# Altium PCB PCB2_0.PcbDoc
Units mm, origin at the board's own origin, x right, y up, seen from the top; angles counter-clockwise.
Board outline 100 x 70 mm, 2 copper layers (Top Layer, Bottom Layer), stack 1.671 mm thick; 68 components, 68 nets, 266 pads, 103 vias.
Unrouted connection lines stored in the file: 58.
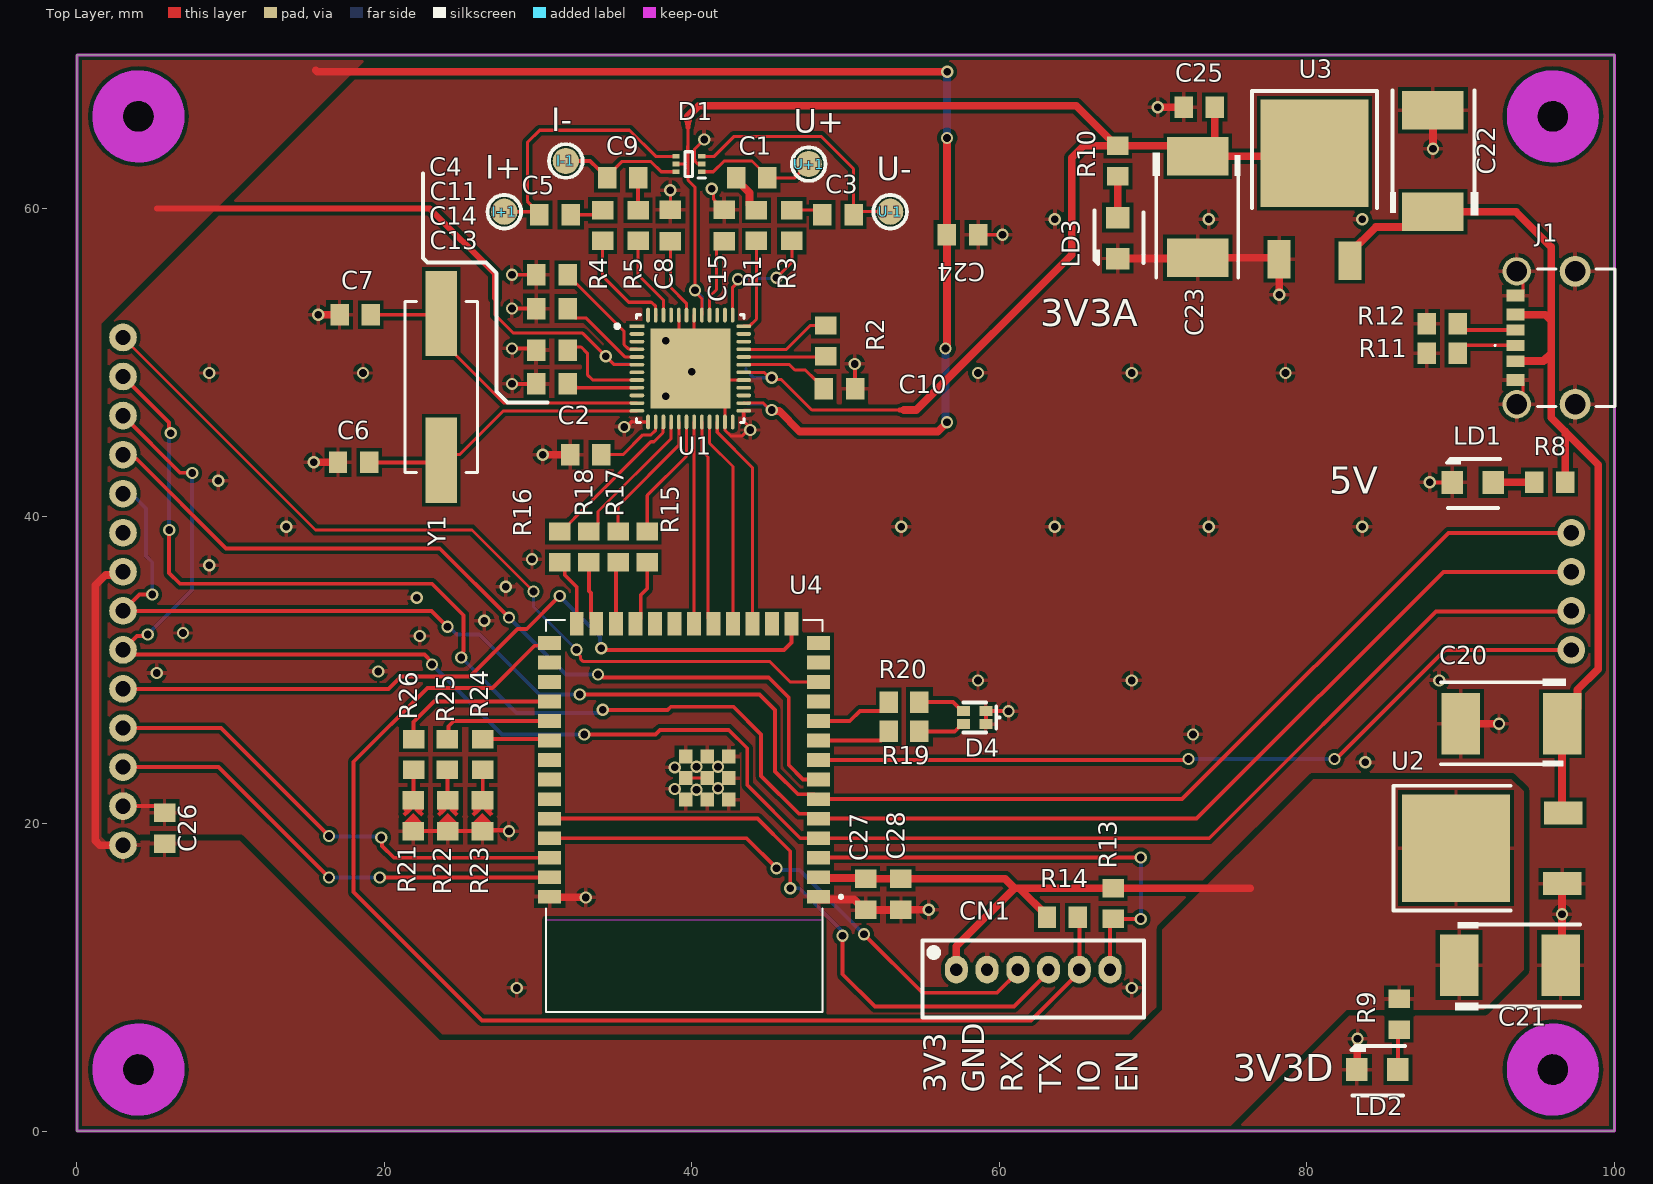
[diagram p0: Top Layer view]
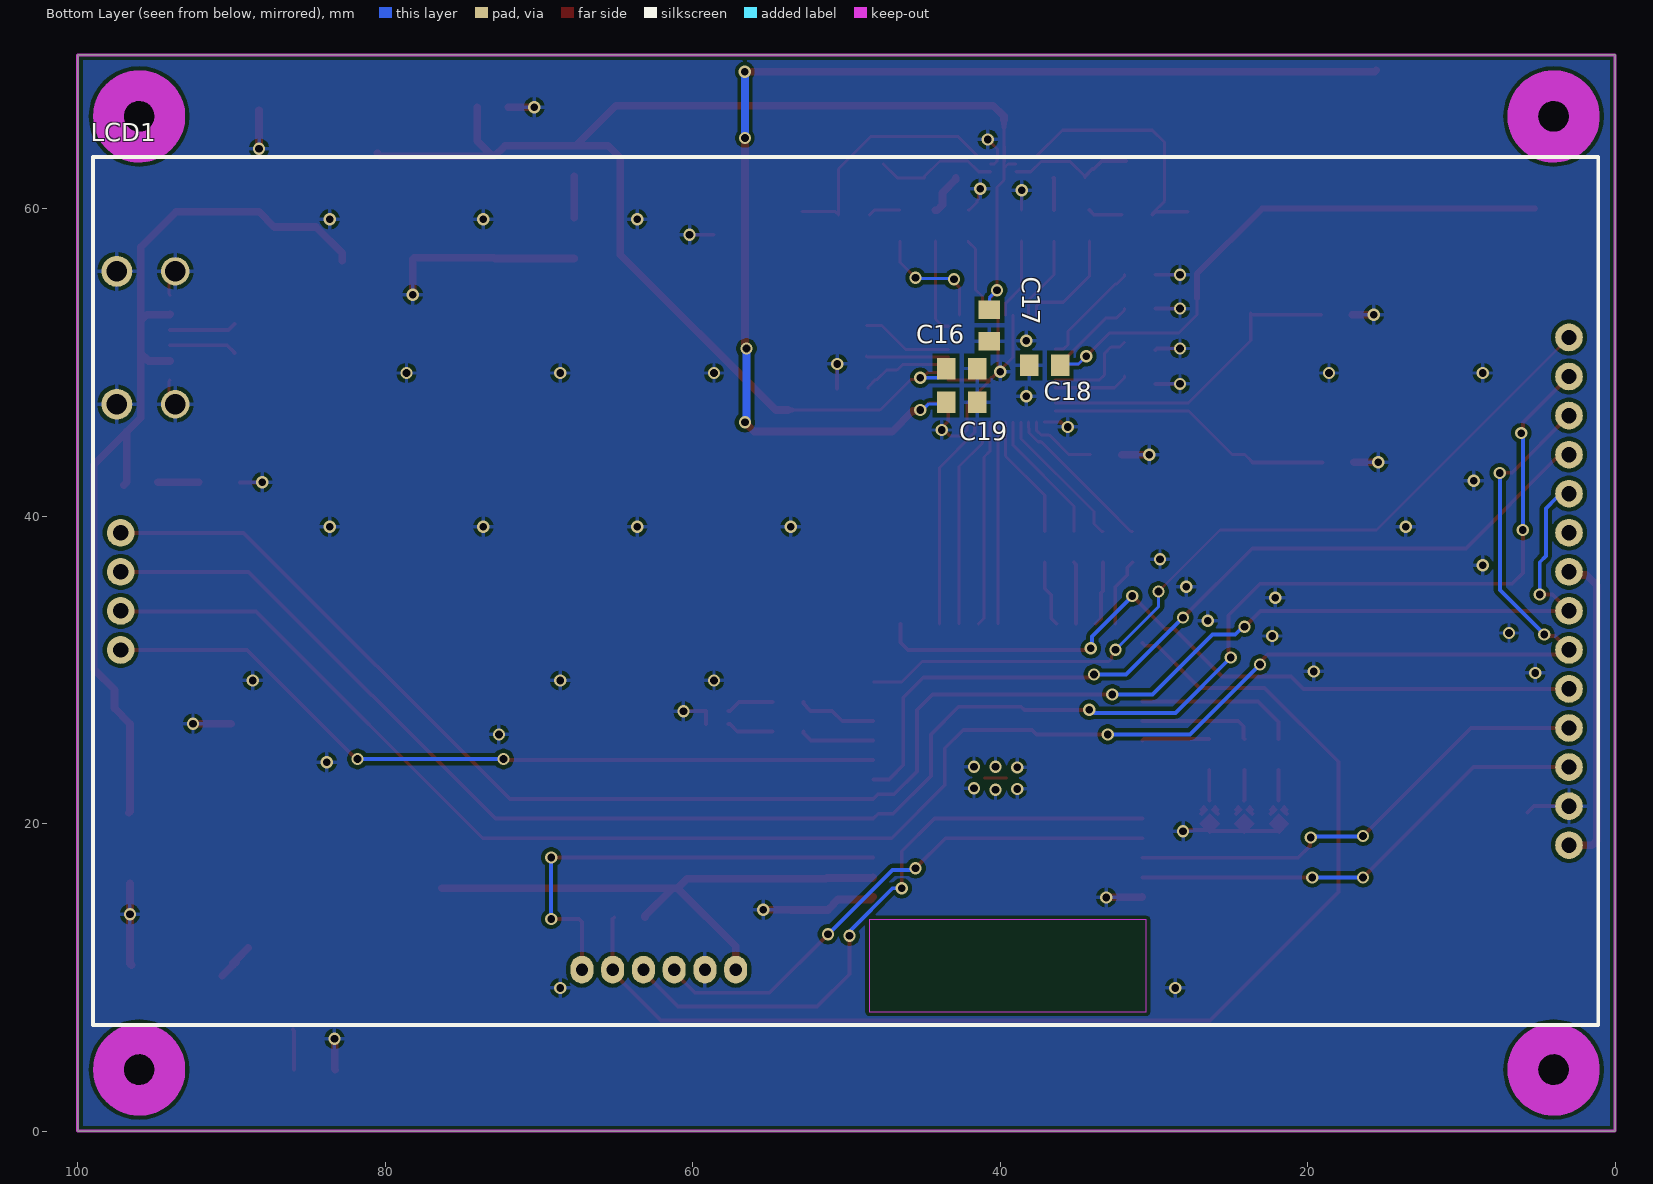
[diagram p1: Bottom Layer view, seen from below]
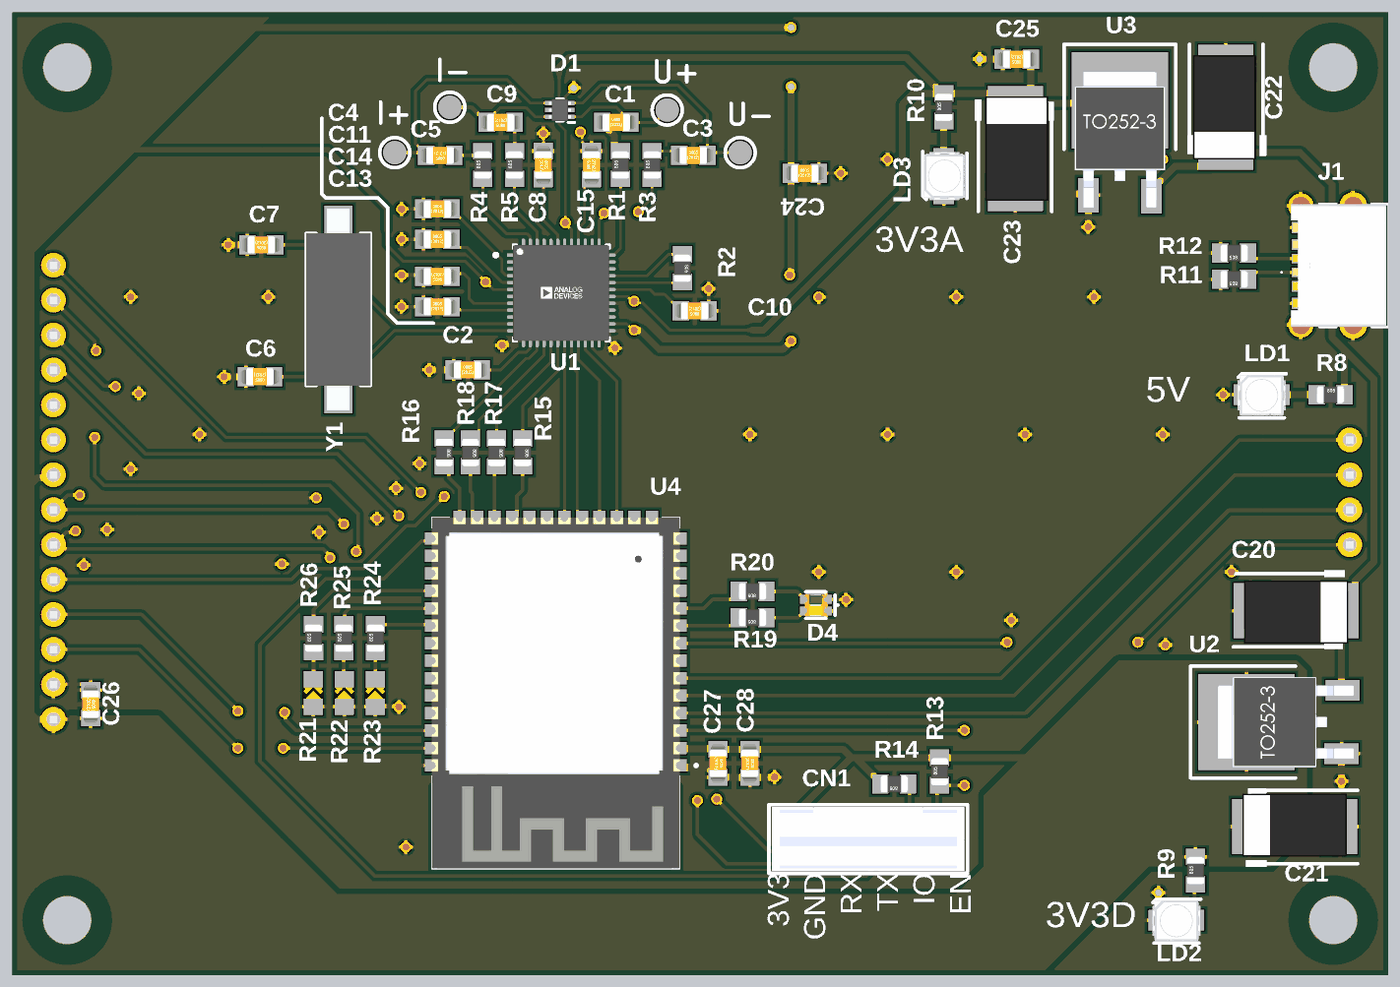
[diagram p2: 3D render of the assembled board from above, using the file's embedded part models]
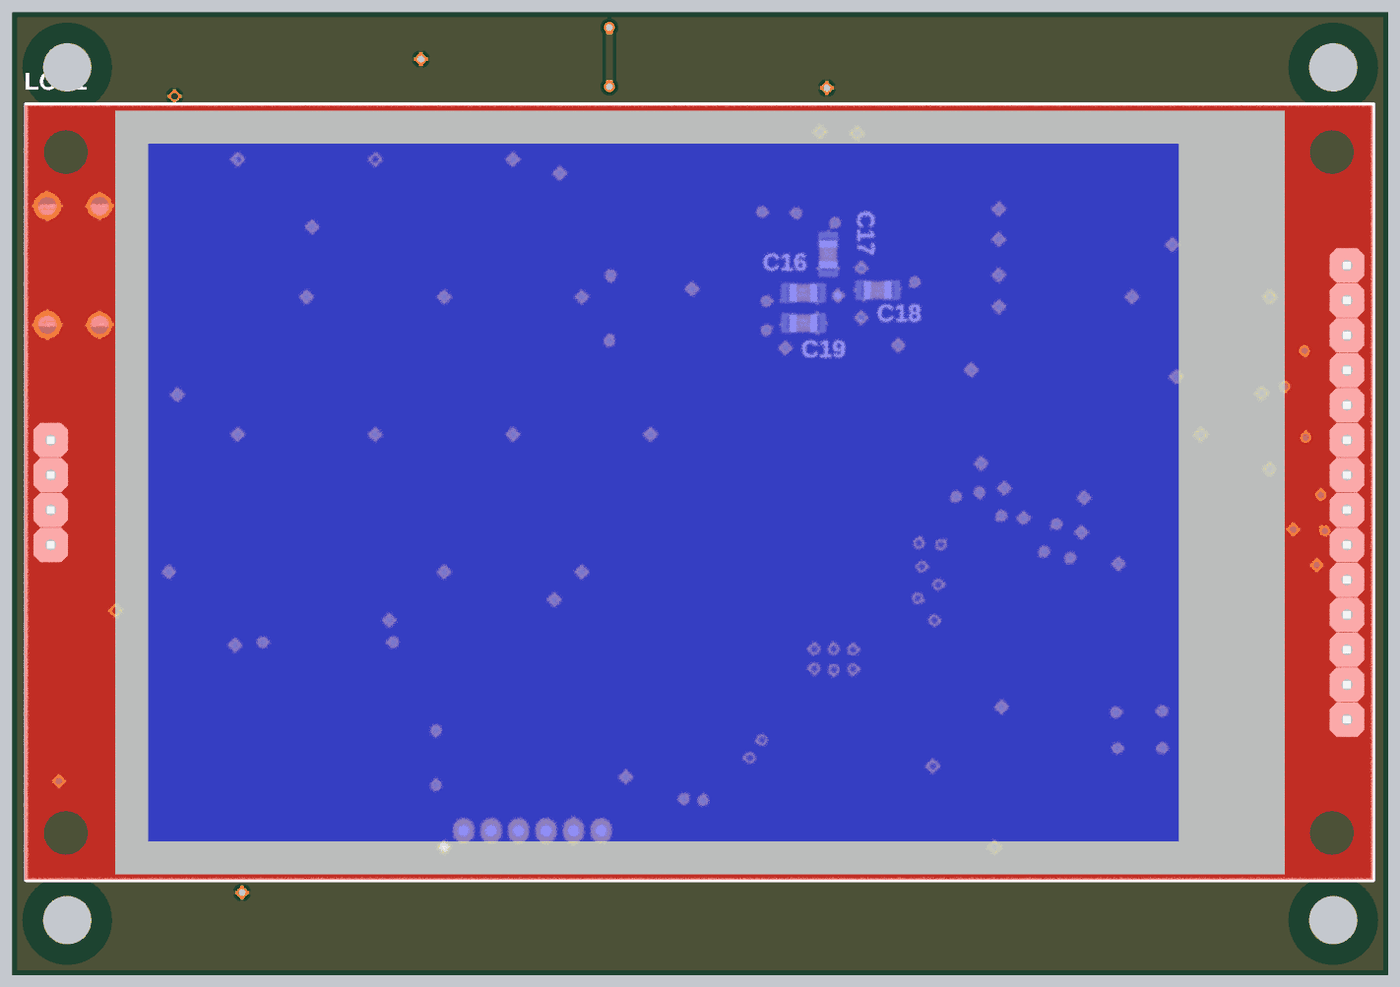
[diagram p3: 3D render of the assembled board from below, using the file's embedded part models]

## Layer stack, top to bottom
Top Solder: solder mask 0.0102, Solder Resist, Dk 3.5
Top Layer: signal copper 0.0356
Dielectric 1: dielectric 1.6, FR-4, Dk 4.8
Bottom Layer: signal copper 0.0356
Bottom Solder: solder mask 0.0102, Solder Resist, Dk 3.5

## Board outline
0,0 0,70 100,70 100,0

## Design rules (kind name [scope] priority, off if disabled: settings)
AssemblyTestPointUsage [All] p1: isadvanced=TRUE
AssemblyTestpoint [All] p1: isadvanced=TRUE testpointundercomponent=TRUE minsize=1.016 maxsize=2.54 preferedsize=1.524 minholesize=0 maxholesize=1.016 preferedholesize=0.813 testpointgrid=0.025 usegrid=TRUE gridtolerance=0 allowsidetop=TRUE allowsidebottom=TRUE
Clearance Clearance_1 [InNamedPolygon('DVDD_L01_P000') vs (InNamedPolygon('GNDbot') OR InNamedPolygon('GNDtop'))] p1: isadvanced=TRUE gap=0.4 ignorepadtopadclearanceinfootprint=FALSE
Clearance Clearance_1 [OnMid vs OnMid] p2: gap=0.254 ignorepadtopadclearanceinfootprint=FALSE sourcerule=41 cellrowname=All cellrowtype=0 cellcolname=All cellcoltype=0 innerlayers=TRUE
Clearance Clearance_2 [(ExistsOnLayer('Top Layer') Or ExistsOnLayer('Bottom Layer')) vs (ExistsOnLayer('Top Layer') Or ExistsOnLayer('Bottom Layer'))] p3: gap=0.254 ignorepadtopadclearanceinfootprint=FALSE sourcerule=41 cellrowname=All cellrowtype=0 cellcolname=All cellcoltype=0 outerlayers=TRUE
Clearance [All] p4: gap=0.254 ignorepadtopadclearanceinfootprint=FALSE ismatrix=TRUE miname0="All Differential Pairs" mitype0=4
ComponentClearance [All] p1: isadvanced=TRUE gap=0.254 collisioncheckmode=3 verticalgap=0.254 showdistances=FALSE
FabricationTestPointUsage [All] p1: isadvanced=TRUE valid=0 allowmultiple=FALSE
FabricationTestpoint [All] p1: isadvanced=TRUE side=3 testpointundercomponent=TRUE minsize=1.016 maxsize=2.54 preferedsize=1.524 minholesize=0 maxholesize=1.016 preferedholesize=0.813 testpointgrid=0.025 allowsidetop=TRUE allowsidebottom=TRUE usegrid=TRUE gridtolerance=0
FanoutControl Fanout_BGA [IsBGA] p1: isadvanced=TRUE bgadir=Out bgaviamode=Centered fanoutstyle=Auto fanoutdirection=Alternating viagrid=0.025 // Fanout_BGA (Default Rule)
FanoutControl Fanout_LCC [IsLCC] p2: isadvanced=TRUE bgadir=Out bgaviamode=Centered fanoutstyle=Auto fanoutdirection=Alternating viagrid=0.025 // Fanout_LCC (Default Rule)
FanoutControl Fanout_SOIC [IsSOIC] p3: isadvanced=TRUE bgadir=Out bgaviamode=Centered fanoutstyle=Auto fanoutdirection=Alternating viagrid=0.025 // Fanout_SOIC (Default Rule)
FanoutControl Fanout_Small [(CompPinCount < 5)] p4: isadvanced=TRUE bgadir=Out bgaviamode=Centered fanoutstyle=Auto fanoutdirection=OutThenIn viagrid=0.025 // Fanout_Small (Default Rule)
FanoutControl Fanout_Default [All] p5: isadvanced=TRUE bgadir=Out bgaviamode=Centered fanoutstyle=Auto fanoutdirection=Alternating viagrid=0.025 // Fanout_Default (Default Rule)
Height [All] p1: isadvanced=TRUE minheight=0 maxheight=25.4 prefheight=12.7
HoleSize [All] p1: isadvanced=TRUE absolutevalues=TRUE maxlimit=4 minlimit=0.025 maxpercent=80.000 minpercent=20.000
HoleToHoleClearance [All] p1: isadvanced=TRUE gap=0.254 allowstackedmicrovias=TRUE
LayerPairs [All] p1: isadvanced=TRUE enforce=TRUE
MinimumSolderMaskSliver [All] p1: isadvanced=TRUE minsoldermaskwidth=0.254
NetAntennae [All] p1: isadvanced=TRUE netantennaetolerance=0
PasteMaskExpansion [All] p1: isadvanced=TRUE expansion=0
PlaneClearance [All] p1: isadvanced=TRUE clearance=0.508
PlaneConnect [All] p1: isadvanced=TRUE planeconnectstyle=Relief reliefexpansion=0.508 reliefentries=4 reliefconductorwidth=0.254 reliefairgap=0.254
PolygonConnect [All] p1: connectstyle=Relief reliefconductorwidth=0.254 reliefentries=4 polygonreliefangle="90 Angle" airgapwidth=0.254
RoutingCorners [All] p1: isadvanced=TRUE cornerstyle=45-Degree minsetback=2.54 maxsetback=2.54
RoutingPriority [All] p1: isadvanced=TRUE routingpriority=0
RoutingVias [All] p1: holewidth=0.5 width=0.8 viastyle="Through Hole" minholewidth=0.5 minwidth=0.8 maxholewidth=0.5 maxwidth=0.8
ShortCircuit [All] p1: isadvanced=TRUE allowed=FALSE
SilkToSilkClearance [All] p1: isadvanced=TRUE silktosilkclearance=0.254
SilkToSolderMaskClearance [IsPad] p1: isadvanced=TRUE minsilkscreentomaskgap=0.254 clearancetoexposedcopper=TRUE
SolderMaskExpansion [All] p1: isadvanced=TRUE expansion=0.102 istentingtop=FALSE
SupplyNets "Schematic Supply Nets_4" [InNet('+5')] p1: isadvanced=TRUE voltage=0.000
SupplyNets "Schematic Supply Nets_3" [InNet('DVDD')] p2: isadvanced=TRUE voltage=0.000
SupplyNets "Schematic Supply Nets_1" [InNet('AVDD')] p3: isadvanced=TRUE voltage=0.000
SupplyNets "Schematic Supply Nets" [InNet('GND')] p4: isadvanced=TRUE voltage=0.000
UnRoutedNet [All] p1: isadvanced=TRUE
UnpouredPolygon [All] p1: isadvanced=TRUE
Width [All] p1: maxlimit=1 minlimit=0.1 preferedwidth=0.254 minimp=50.000000 maximp=50.000000 favimp=50.000000
4 further rules are at their usual default settings.

## Components (designator, comment, footprint, x,y, rotation, side; value= is the part's Value field where it differs from the comment)
C1 "CAP SMD CER 10UF 50V 1206" CAP0805OK 43.9,62 r0 top value=10uF
C2 "CAP SMD CER 470NF 100V 0805" CAP0805OK 33.1,44 r0 top value=470nF
C3 "CAP SMD CER 10UF 50V 1206" CAP0805OK 49.5,59.6 r0 top value=10uF
C4 "CAP SMD CER 470NF 100V 0805" CAP0805OK 30.9,55.7 r0 top value=470nF
C5 "CAP SMD CER 10UF 50V 1206" CAP0805OK 31.1,59.6 r180 top value=10uF
C6 "CAP SMD CER 6.8PF 25V 0805" CAP0805OK 18,43.5 r180 top value=6.8pF
C7 "CAP SMD CER 6.8PF 25V 0805" CAP0805OK 18.1,53.1 r180 top value=6.8pF
C8 "CAP SMD CER 4.7UF 50V 0805" CAP0805OK 38.6,58.9 r270 top value=4.7uF
C9 "CAP SMD CER 10UF 50V 1206" CAP0805OK 35.5,62 r180 top value=10uF
C10 "CAP SMD CER 470NF 100V 0805" CAP0805OK 49.6,48.3 r180 top value=470nF
C11 "CAP SMD CER 470NF 100V 0805" CAP0805OK 30.9,53.5 r0 top value=470nF
C13 "CAP SMD CER 1UF 10V 0805" CAP0805OK 30.9,48.6 r0 top value=1uF
C14 "CAP SMD CER 100NF 25V 0805" CAP0805OK 30.9,50.8 r180 top value=100nF
C15 "CAP SMD CER 4.7NF 25V 0805" CAP0805OK 42.1,58.9 r90 top value=4.7nF
C16 "CAP SMD CER 100NF 25V 0805" CAP0805OK 42.5,49.6 r180 bottom value=100nF
C17 "CAP SMD CER 100NF 25V 0805" CAP0805OK 40.7,52.4 r270 bottom value=100nF
C18 "CAP SMD CER 100NF 25V 0805" CAP0805OK 37.1,49.8 r0 bottom value=100nF
C19 "CAP SMD CER 100NF 25V 0805" CAP0805OK 42.5,47.4 r180 bottom value=100nF
C20 "CAP SMD TAN 10UF 25V 2312" CAP2312 93.3,26.4 r180 top value=10uF
C21 "CAP SMD TAN 10UF 25V 2312" CAP2312 93.2,10.9 r0 top value=10uF
C22 "CAP SMD TAN 10UF 25V 2312" CAP2312 88.1,63.1 r90 top value=10uF
C23 "CAP SMD TAN 10UF 25V 2312" CAP2312 73,60.1 r270 top value=10uF
C24 "CAP SMD CER 100NF 25V 0805" CAP0805OK 57.6,58.3 r0 top value=100nF
C25 "CAP SMD CER 100NF 25V 0805" CAP0805OK 73,66.6 r180 top value=100nF
C26 "CAP SMD CER 100NF 25V 0805" CAP0805OK 5.7,19.7 r270 top value=100nF
C27 "CAP SMD CER 100NF 25V 0805" CAP0805OK 51.3,15.4 r270 top value=100nF
C28 "CAP SMD CER 100NF 25V 0805" CAP0805OK 53.6,15.4 r270 top value=100nF
CN1 "CN MAC 6 VIAS 180º 2.54MM" PHMC4-06 57.2,10.5 r0 top
D1 "SP3004-04XTG" SOTFL50P160X60-6N 39.8,62.9 r180 top
D4 "LED SMD DUAL" LTST-C197 58.4,26.9 r90 top value=BRANCO
I+1 "I+" "TEST POINT" 27.8,59.8 r0 top
I-1 "I-" "TEST POINT" 31.8,63.1 r0 top
J1 "USB-C-10164359-00011LF" USB-C-1016435900011LF 96.6,51.6 r90 top
LCD1 "Display 3,5\"" "Display_3.5\"_SPI_480X320" 99.1,6.92 r180 bottom locked
LD1 "PLCC-2" PLCC-2 90.8,42.2 r180 top
LD2 "PLCC-2" PLCC-2 84.6,4 r180 top
LD3 "PLCC-2" PLCC-2 67.7,58.1 r270 top
R1 "RES SMD 1K6 0.1% 0805" res0805ok 44.2,58.9 r90 top value=1K
R2 "RES SMD 1K 1% 0805" res0805ok 48.7,51.4 r270 top value=1K
R3 "RES SMD 1K6 0.1% 0805" res0805ok 46.5,58.9 r90 top value=1K
R4 "RES SMD 100R 1% 0805" res0805ok 34.2,58.9 r90 top value=100
R5 "RES SMD 100R 1% 0805" res0805ok 36.5,58.9 r90 top value=100
R8 "RES SMD 1K 1% 0805" res0805ok 95.8,42.2 r0 top value=470
R9 "RES SMD 1K 1% 0805" res0805ok 86,7.6 r90 top value=470
R10 "RES SMD 1K 1% 0805" res0805ok 67.7,63.1 r90 top value=470
R11 "RES SMD 5K6 1% 0805" res0805ok 88.8,50.6 r180 top value=5K6
R12 "RES SMD 5K6 1% 0805" res0805ok 88.8,52.5 r180 top value=5K6
R13 "RES SMD 10K 1% 0805" res0805ok 67.4,14.8 r90 top value=10K
R14 "RES SMD 10K 1% 0805" res0805ok 64.1,13.9 r180 top value=10K
R15 "RES SMD 10 1% 0805" res0805ok 37.1,38 r270 top value=10
R16 "RES SMD 10 1% 0805" res0805ok 31.4,38 r270 top value=10
R17 "RES SMD 10 1% 0805" res0805ok 35.2,38 r270 top value=10
R18 "RES SMD 10 1% 0805" res0805ok 33.3,38 r270 top value=10
R19 "RES SMD 1K 1% 0805" res0805ok 53.8,26 r180 top value=470
R20 "RES SMD 1K 1% 0805" res0805ok 53.8,27.9 r180 top value=470
R21 "RES SMD 10K 1% 0805" JMP0805 21.882,20.511 r270 top value=JMP
R22 "RES SMD 10K 1% 0805" JMP0805 24.132,20.511 r270 top value=JMP
R23 "RES SMD 10K 1% 0805" JMP0805 26.382,20.511 r270 top value=JMP
R24 "RES SMD 10K 1% 0805" res0805ok 26.4,24.5 r90 top value=10K
R25 "RES SMD 10K 1% 0805" res0805ok 24.1,24.5 r90 top value=10K
R26 "RES SMD 10K 1% 0805" res0805ok 21.9,24.5 r90 top value=10K
U1 "AD5941BCPZ" FP-CP-48-4-IPC_A 39.9,49.6 r0 top
U2 "LM1117" TO252-3 89.7,18.4 r90 top
U3 "LM1117" TO252-3 80.5,63.6 r0 top
U4 "IC SMD ESP32-S3-WROOM-1-N4R2" XCVR_ESP32-S3-WROOM-1-N4R2 39.5,20.5 r180 top
U+1 "U+" "TEST POINT" 47.6,62.9 r0 top
U-1 "U-" "TEST POINT" 52.9,59.8 r0 top
Y1 "XTAL SMD 16MHZ" "XTAL SMD 16MHZ" 23.7,48.4 r270 top

## Footprints (in the part's own frame and the unit in brackets; to place one, negate y for a bottom-side part, rotate by r counter-clockwise, add the part's x,y. Pads: shape width x height; smd on the part's side, far side on the other; paste and mask are expansions set on the pad)
CAP0805OK [mm]
  rect 1.2x1.4 smd: 1(-1.016,0) 2(1.016,0)
  body extent -1.4,-0.62 1.4,0.62, height 0.8
CAP2312 [mm]
  rect 2.5x4 smd: 1(-3.3,-0.1) 2(3.3,-0.1)
  silkscreen extent -3.56,-3.05 4.57,2.7, body extent -3.8,-2.3 3.8,2.3, height 3.1
"Display_3.5\"_SPI_480X320" [mm]
  round 1.8 hole 1: 1(96.1,11.68) 2(96.1,14.22) 3(96.1,16.76) 4(96.1,19.3) 5(96.1,21.84) 6(96.1,24.38) 7(96.1,26.92) 8(96.1,29.46) 9(96.1,32) 10(96.1,34.54) 11(96.1,37.08) 12(96.1,39.62) 13(96.1,42.16) 14(96.1,44.7) 15(1.9,31.995) 16(1.9,29.455) 17(1.9,26.915) 18(1.9,24.375)
  silkscreen extent 0.1,-0.03 98,56.43, body extent 0,0 98,56.34, height 11.7
FP-CP-48-4-IPC_A [mm]
  rect 0.961x0.239 smd paste+0 mask+0: 1(-3.476,2.75)
  rrect100% 0.961x0.239 smd paste+0 mask+0: 2(-3.476,2.25) 3(-3.476,1.75) 4(-3.476,1.25) 5(-3.476,0.75) 6(-3.476,0.25) 7(-3.476,-0.25) 8(-3.476,-0.75) 9(-3.476,-1.25) 10(-3.476,-1.75) 11(-3.476,-2.25) 12(-3.476,-2.75) 25(3.476,-2.75) 26(3.476,-2.25) 27(3.476,-1.75) 28(3.476,-1.25) 29(3.476,-0.75) 30(3.476,-0.25) 31(3.476,0.25) 32(3.476,0.75) 33(3.476,1.25) 34(3.476,1.75) 35(3.476,2.25) 36(3.476,2.75)
  rrect100% 0.239x0.961 smd paste+0 mask+0: 13(-2.75,-3.476) 14(-2.25,-3.476) 15(-1.75,-3.476) 16(-1.25,-3.476) 17(-0.75,-3.476) 18(-0.25,-3.476) 19(0.25,-3.476) 20(0.75,-3.476) 21(1.25,-3.476) 22(1.75,-3.476) 23(2.25,-3.476) 24(2.75,-3.476) 37(2.75,3.476) 38(2.25,3.476) 39(1.75,3.476) 40(1.25,3.476) 41(0.75,3.476) 42(0.25,3.476) 43(-0.25,3.476) 44(-0.75,3.476) 45(-1.25,3.476) 46(-1.75,3.476) 47(-2.25,3.476) 48(-2.75,3.476)
  rect 5.2x5.2 smd paste-1000 mask+0: 49(0,0)
  silkscreen extent -4.88,-3.5 3.5,3.5, body extent -4.46,-4.46 4.46,4.46, height 0.25
JMP0805 [mm]
  rect 1.2x1.4 smd: 1(-1,0) 2(1,0)
  Top Layer region: -0.089,-0.368 -0.406,-0.051 -0.724,-0.368 -0.406,-0.686
  Top Layer region: 0.064,-0.521 -0.241,-0.216 -0.432,-0.406 -0.127,-0.711
  Top Layer region: -0.127,0.711 -0.432,0.406 -0.241,0.216 0.064,0.521
  Top Layer region: -0.406,0.686 -0.724,0.368 -0.406,0.051 -0.089,0.368
  Top Layer region: 0.533,-0.711 1.219,-0.025 0.508,0.686 -0.178,0
LTST-C197 [mm] "dual led 0606"
  rect 0.65x0.85 smd: 1(0.424,0.728) 2(-0.424,0.728) 3(0.424,-0.727) 4(-0.424,-0.727)
  silkscreen extent -0.97,-1.6 0.97,0.73, body extent -0.8,-0.8 0.8,0.8, height 0.6
PHMC4-06 [mm]
  oval 1.5x1.8 hole 0.8: 1(0,0) 2(2,0) 3(4,0) 4(6,0) 5(8,0) 6(10,0)
  silkscreen extent -2.21,-3.1 12.22,1.91, body extent -2,-2.93 12,1.72, height 6.02
PLCC-2 [mm]
  rect 1.4x1.5 smd: 1(-1.321,0) 2(1.346,0)
  silkscreen extent -1.78,-1.52 1.7,1.68, body extent -1.75,-1.43 1.75,1.53, height 1.75
res0805ok [mm]
  rect 1.2x1.4 smd: 1(-1,0) 2(1,0)
  body extent -1,-0.62 1,0.63, height 0.78
SOTFL50P160X60-6N [mm]
  rect 0.475x0.3 smd: 1(-0.838,0.5) 2(-0.838,0) 3(-0.838,-0.5) 4(0.838,-0.5) 5(0.838,0) 6(0.838,0.5)
  silkscreen extent -1.07,-0.8 0.25,0.9, body extent -0.8,-0.8 0.8,0.8, height 0.6
"TEST POINT" [mm]
  round 1.7 smd: 0(0,0)
  silkscreen extent -1.09,-1.09 1.09,1.09
TO252-3 [mm]
  rect 1.5x2.5 smd: 1(-2.3,-6.9) 3(2.3,-6.985)
  rect 7x7 smd: 2(0,0)
  silkscreen extent -4.06,-3.56 4.06,4.06, body extent -3.29,-7.81 3.29,2.1, height 2.29
USB-C-1016435900011LF [mm]
  rect 0.7x1.2 smd: A5(-0.5,3.03) B5(0.5,3.03)
  rect 0.76x1.2 smd: A9(1.52,3.03) B9(-1.52,3.03)
  rect 0.8x1.2 smd: A12(2.75,3.03) B12(-2.75,3.03)
  round 1.85 hole 1.34: MH1(-4.32,2.95) MH2(4.32,2.95)
  round 2.01 hole 1.34: MH3(-4.32,-0.85) MH4(4.32,-0.85)
  silkscreen extent -4.47,-3.45 4.47,4.4, body extent -4.47,-3.24 4.47,3.66, height 3.25
XCVR_ESP32-S3-WROOM-1-N4R2 [mm]
  rect 1.5x0.9 smd: 1(-8.75,5.26) 2(-8.75,3.99) 3(-8.75,2.72) 4(-8.75,1.45) 5(-8.75,0.18) 6(-8.75,-1.09) 7(-8.75,-2.36) 8(-8.75,-3.63) 9(-8.75,-4.9) 10(-8.75,-6.17) 11(-8.75,-7.44) 12(-8.75,-8.71) 13(-8.75,-9.98) 14(-8.75,-11.25) 27(8.75,-11.25) 28(8.75,-9.98) 29(8.75,-8.71) 30(8.75,-7.44) 31(8.75,-6.17) 32(8.75,-4.9) 33(8.75,-3.63) 34(8.75,-2.36) 35(8.75,-1.09) 36(8.75,0.18) 37(8.75,1.45) 38(8.75,2.72) 39(8.75,3.99) 40(8.75,5.26)
  rect 0.9x1.5 smd: 15(-6.985,-12.5) 16(-5.715,-12.5) 17(-4.445,-12.5) 18(-3.175,-12.5) 19(-1.905,-12.5) 20(-0.635,-12.5) 21(0.635,-12.5) 22(1.905,-12.5) 23(3.175,-12.5) 24(4.445,-12.5) 25(5.715,-12.5) 26(6.985,-12.5)
  rect 0.9x0.9 smd: 41_1(-1.5,-2.46) 41_2(-2.9,-2.46) 41_3(-0.1,-2.46) 41_4(-2.9,-3.86) 41_5(-1.5,-3.86) 41_6(-0.1,-3.86) 41_7(-2.9,-1.06) 41_8(-1.5,-1.06) 41_9(-0.1,-1.06)
  Keep-Out Layer region: 9,6.75 -9,6.75 -9,12.75 9,12.75
  Keep-Out Layer region: 9,6.75 -9,6.75 -9,12.75 9,12.75
  silkscreen extent -10.3,-12.75 9,12.75, body extent -9,-12.75 9,12.75, height 3.25
"XTAL SMD 16MHZ" [mm]
  rect 5.55x2.05 smd: 1(-4.775,0) 2(4.775,0)
  silkscreen extent -5.55,-2.35 5.55,2.35, body extent -7.34,-2.35 7.34,2.35, height 4.6

## Part data
C1 C3 C5 C9: library part "CAP SMD CER 10UF 10V 0805", "Multilayer Ceramic Capacitors MLCC - SMD/SMT 10 uF 10 VDC 10% 0805 X7R", Tolerance=20%, Voltage=50V, COD. CRISTOFOLI=EMP.00322, List="CAP CER 10UF 50V X5R 1206/UMK316BBJ106ML-T/Generic", Type=CERAMIC
C2 C4 C10 C11: Tolerance=10%, Voltage=100V, COD. CRISTOFOLI=EMP.00245, List="CAP CER 0.47UF 100V 10% X7R 0805/GRM21BR72A474KA73L/Murata Electronics North America", Type=CERAMIC
C6 C7 C15: library part "CAP SMD CER 100NF 25V 0805", Tolerance=10%, Voltage=25V, COD. CRISTOFOLI=EMP.00094, List="CAP CER 0.1UF 25V 10% X7R 0805/CGJ4J2X7R1E104K125AA/TDK", Type=CERAMIC
C8: Tolerance=10%, Voltage=50V, COD. CRISTOFOLI=EMP.00333, List="CAP CER 4.7UF 50V X5R 0805/CL21A475KBQNNNE/Samsung", Type=CERAMIC
C13: Tolerance=20%, Voltage=10V, COD. CRISTOFOLI=EMP.00209, List="CAP- SMD/SMT X7R 0805 10V 1uF 20%/LMK212BJ105MG-T/Taiyo Yuden", Type=CERAMIC
C14 C16 C17 C18 C19 C24 C25 C26 C27 C28: Tolerance=10%, Voltage=25V, COD. CRISTOFOLI=EMP.00094, List="CAP CER 0.1UF 25V 10% X7R 0805/CGJ4J2X7R1E104K125AA/TDK", Type=CERAMIC
C20 C21 C22 C23: Tolerance=20%, Voltage=25V, COD. CRISTOFOLI=EMP.00040, List="CAP TANT 10UF 25V 20% 2312 / 293D106X0025C2TE3 / Vishay", Type=TANTALUM
CN1: "gravação micro", Manufacturer=METALTEX, Manufacturer Part Number=PHMC4-06, COD. CRISTOFOLI=EMP.00436, List="Barra de pinos Macho 180° / BPSC-03 / metaltex"
D1: "TVS Diode (Uni-directional)", Manufacturer_Name=LITTELFUSE, Mouser Part Number=576-SP3004-04XTG, Arrow Part Number=SP3004-04XTG, Arrow Price/Stock=https://www.arrow.com/en/products/sp3004-04xtg/littelfuse?region=nac, Datasheet Link=https://m.littelfuse.com/~/media/electronics/datasheets/tvs_diode_arrays/littelfuse_tvs_diode_array_sp3004_datasheet.pdf.pdf, Height=0.6mm, Manufacturer_Part_Number=SP3004-04XTG, Mouser Price/Stock=https://www.mouser.co.uk/ProductDetail/Littelfuse/SP3004-04XTG?qs=trbuaetfxXQ7JjseAkJ3Ww%3D%3D
I+1 I-1 U+1 U-1: library part "TEST POINT"
J1: "Connector", Arrow Part Number=10164359-00011LF, Manufacturer_Name=Amphenol, Mouser Part Number=649-10164359-00011LF, Arrow Price/Stock=https://www.arrow.com/en/products/10164359-00011lf/amphenol-fci?region=nac, Datasheet Link=https://cdn.amphenol-cs.com/media/wysiwyg/files/drawing/10164359.pdf, Height=3.41mm, Manufacturer_Part_Number=10164359-00011LF, Mouser Price/Stock=https://www.mouser.co.uk/ProductDetail/Amphenol-FCI/10164359-00011LF?qs=MyNHzdoqoQLpQ%2FmSqA1%252BtQ%3D%3D
LCD1: library part "Display 3,5\" SPI", "Display TFT SPI 480X320", COD. CRISTOFOLI=EMP.00435, Datasheet=http://www.lcdwiki.com/res/MSP3520/3.5inch_SPI_Module_MSP3520_User_Manual_EN.pdf, Documentações=http://www.lcdwiki.com/3.5inch_SPI_Module_ILI9488_SKU:MSP3520, List="Display TFT 3.5\" SPI 480X320 MSP3520"
LD1 LD2 LD3: library part "LED branco /67-21S/KK5C-H6565N32P02833Z6/2T(EMM)/Everlight", COD. CRISTOFOLI=EMP.00388, List="LED branco /67-21S/KK5C-H6565N32P02833Z6/2T(EMM)/Everlight"
R1 R2 R3: Tolerance=0.1%
  R1 R3: COD. CRISTOFOLI=EMP.00204, List="RES 1.6K OHM 1/8W .1% 0805 SMD/ERA-6AEB162V/Panasonic Electronic Components/Generic"
  R2: COD. CRISTOFOLI=EMP.50098, List="RES SMD 1K 1% 0805"
R4 R5: library part "RES SMD 10R 1% 0805", Tolerance=1%, COD. CRISTOFOLI=EMP.50001, List="RES SMD 10R 1% 0805"
R8 R9 R10 R13 R14 R19 R20 R21 R22 R23 R24 R25 R26: Tolerance=1%
  R8 R9 R10 R19 R20: COD. CRISTOFOLI=EMP.50098, List="RES SMD 1K 1% 0805"
  R13 R14 R21 R22 R23 R24 R25 R26: COD. CRISTOFOLI=EMP.50116, List="RES SMD 10K 1% 0805"
R11 R12 R15 R16 R17 R18: library part "RES SMD 10K 1% 0805", Tolerance=1%, COD. CRISTOFOLI=EMP.50116, List="RES SMD 10K 1% 0805"
U1: library part CMP-09085-000021-2, "BIO-IMPEDANCE & ELECTROCHEMICAL", RoHS Compliant=Yes
U2 U3: library part "IC SMD REG LM1117 TO252", "800mA Low-Dropout Linear Regulator", Manufacturer="Texas Instruments", Voltage="1.8 A 5V", COD. CRISTOFOLI=EMP.50030, List="IC SMD REG LM1117 TO252"
U4: "Bluetooth, WiFi 802.11b/g/n, Bluetooth v5.0 Transceiver Module 2.4GHz PCB Trace Surface Mount", Package=None, Availability="In Stock", Check_prices=https://www.snapeda.com/parts/ESP32-S3-WROOM-1-N4R2/Espressif+Systems/view-part/?ref=eda, COD. CRISTOFOLI=EMP.50161, List="IC SMD ESP32-S3-WROOM-1-N4R2", MF="Espressif Systems", MP=ESP32-S3-WROOM-1-N4R2, Price=None, Purchase-URL=https://pricing.snapeda.com/search/part/ESP32-S3-WROOM-1-N4R2/?ref=eda, SnapEDA_Link=https://www.snapeda.com/parts/ESP32-S3-WROOM-1-N4R2/Espressif+Systems/view-part/?ref=snap
Y1: "Crystal or Oscillator", Arrow Part Number=XT9M20ANA16M, Manufacturer_Name=Vishay, Mouser Part Number=73-XT49M1600-20, Arrow Price/Stock=https://www.arrow.com/en/products/xt9m20ana16m/vishay?region=nac, Datasheet Link=https://componentsearchengine.com/Datasheets/5/XT9M20ANA16M.pdf, Height=4.5mm, Manufacturer_Part_Number=XT9M20ANA16M, Mouser Price/Stock=https://www.mouser.co.uk/ProductDetail/Vishay-Dale/XT9M20ANA16M?qs=NVJATC80C4%252B3oEpMmPFr7g%3D%3D
D4: COD. CRISTOFOLI=EMP.00010, List="LED - SMD WHITE CLEAR NON-DIFF - SUN LED XZCWD105S / EVERLIGHT 67-21UKC/S3282/TR8-D ( descontinuado) //67-21S/KK2C-H6565M41N42936Z6/2T"

## Free pads (board coordinates)
  round 0 hole 3.5: 1(4,4) 1(4,66) 1(96,4) 1(96,66)

## Via types
v1: diameter 0.8, hole 0.5, Top Layer to Bottom Layer, 103 vias

## Nets (pads, with @x,y where several pads share a name; then routed paths per layer and width w, separated by ;. In a path a pad name is that pad's centre, name@x,y a point inside that pad or via, vN(x,y) a via of type N, cw(c..) or ccw(c..) an arc to the next point about the centre after c; other vN are vias at no path point)
+5: C20.1 C22.1 J1.A9 J1.B9 R8.2 U2.3 U3.3 | length 62.6
  Top Layer w0.5: U3.3 82.8,57.115 84.485,58.8 87.2,58.8 C22.1 93.6,59.8 95.9,57.5 95.9,52.7 ; J1.B9@93.981,50.092 95.392,50.092 95.9,50.6 ; J1.A9@93.981,53.132 94.013,53.1 95.5,53.1 95.9,52.7 ; U2.3 96.6,20.785 C20.1 97.6,27.5 97.6,28.7 98.956,30.056 98.956,43.344 96.8,45.5 ; R8.2@97,42 R8.2 96.8,45.5 ; 95.9,50.6 95.9,46.4 96.8,45.5 ; 95.9,50.6 95.9,52.7
AD_CS: R16.1 U1.15 | length 10.1
  Top Layer w0.2: R16.1 31.5,39 32.246,39.746 ; 32.246,39.747 32.453,39.954 37.336,44.836 37.534,44.836 38.124,45.425 38.124,45.709 38.13,45.716 38.13,45.733 38.15,45.753 U1.15
AD_GP0: U1.19 U4.20 | length 13.1
  Top Layer w0.2: U4.20 40.15,33.015 U1.19
AD_GP1: U1.20 U4.19 | length 13.4
  Top Layer w0.2: U1.20 40.65,44.25 41.055,43.845 41.055,33.35 U4.19
AD_GP2: U1.21 U4.18 | length 13.8
  Top Layer w0.2: U1.21 41.15,44.75 42.675,43.225 U4.18
AD_MISO: R15.1 U1.18 | length 8.2
  Top Layer w0.2: R15.1 37.1,41.351 39.65,43.901 U1.18
AD_MOSI: R17.1 U1.17 | length 8.8
  Top Layer w0.2: R17.1 35.2,40.651 39.15,44.601 U1.17
AD_RESET_N: U1.22 U4.17 | length 14.1
  Top Layer w0.2: U1.22 41.65,45.45 43.945,43.155 U4.17
AD_SCLK: R18.1 U1.16 | length 9.4
  Top Layer w0.2: R18.1 33.4,39 33.9,39.5 33.9,40.3 38.65,45.05 U1.16
AIN2: R3.1 U1.37 | length 7.8
  Top Layer w0.2: U1.37 42.65,54.888 43,55.238 v1(43,55.4) ; v1(45.5,55.5) 46.5,56.5 R3.1
  Bottom Layer w0.2: v1(43,55.4) 43.05,55.45 45.45,55.45 v1(45.5,55.5)
AIN3: R1.1 U1.36 | length 6.1
  Top Layer w0.2: U1.36 43.736,52.35 44.2,52.814 R1.1
AIN4: C15.1 U1.40 | length 5.2
  Top Layer w0.2: U1.40 41.15,54.284 41.6,54.734 41.6,57.384 C15.1
AVDD: C16.1 C17.1 C23.1 C25.1 D1.5 R10.2 U1.30 U1.41 U3.2 | length 100
  Top Layer w0.2: D1.5 39.35,62.9 39.483,62.9 39.75,62.633 ; 39.75,65.25 39.75,64.092 39.73,64.072 39.73,63.024 39.75,63.004 39.75,62.633 ; U1.41 40.65,54.16 40.2,54.61 40.2,61.4 39.75,61.85 39.75,62.633 ; U1.30 44.688,49.35 45.038,49 v1(45.2,49) 45.315,48.885 45.815,48.885 47.8,46.9 53.5,46.9
  Top Layer w0.3: 39.75,65.25 39.75,65.5 ; 53.5,46.9 53.7,46.9
  Top Layer w0.4: 39.75,65.5 39.75,65.75 ; 53.7,46.9 53.8,46.9
  Top Layer w0.5: 39.75,65.75 39.75,66 40.45,66.7 65,66.7 67.6,64.1 72.2,64.1 C23.1 C23.1@73.016,63.4 ; 53.8,46.9 54.6,46.9 64.7,57 64.7,63.3 65.5,64.1 R10.2 ; C25.1 74.016,64.4 C23.1@73.016,63.4 ; U3.2 80.3,63.4 C23.1@73.016,63.4
  Bottom Layer w0.2: v1(40.2,54.7) 40.7,54.2 C17.1 ; C16.1 43.516,49.5 44.016,49 v1(45.2,49)
AVDD_REG: C11.2 U1.5 | length 5.9
  Top Layer w0.2: C11.2 31.916,53.4 32.416,52.9 33.1,52.9 35.644,50.356 36.418,50.356 U1.5
CE0: R4.1 U1.47 | length 7.1
  Top Layer w0.2: R4.1 34.2,55.6 35.89,53.91 37.346,53.91 37.356,53.9 37.4,53.9 37.642,53.658 37.642,53.083 U1.47
DE0: R5.1 U1.46 | length 5.5
  Top Layer w0.2: R5.1 36.5,55.7 38.15,54.05 U1.46
DVDD: C18.1 C19.1 C21.1 C24.1 C26.2 C27.1 C28.1 CN1.1 LCD1.1 LCD1.8 R9.2 R13.2 R14.2 U1.6 U1.26 U2.2 U4.2 | length 180.5
  Top Layer w0.2: 27.2,54.2 27.2,53.1 28.4,51.9 32.9,51.9 v1(34.4,50.4) 34.95,49.85 U1.6 ; U1.26 44.661,47.351 45.111,46.9 v1(45.2,46.9)
  Top Layer w0.4: 5.2,60 22.966,60 27.2,55.766 27.2,54.2
  Top Layer w0.5: LCD1.1 1.5,18.6 1.2,18.9 1.2,35.5 1.873,36.173 2.793,36.173 LCD1.8 ; 15.533,69 15.633,68.9 v1(56.605,68.9) ; v1(45.2,46.9) 45.257,46.843 45.671,46.843 47.014,45.5 56,45.5 v1(56.6,46.1) ; U4.2 48.297,16.463 51.253,16.463 C27.1 C28.1 60.367,16.416 60.983,15.8 ; v1(56.5,50.9) 56.5,50.981 56.6,51.081 v1(56.6,64.6) ; CN1.1 57.2,12.017 60.983,15.8 ; R14.2 63.1,14 61.3,15.8 ; 76.3,15.8 R13.2 61.3,15.8 ; C21.1@88.9,11.916 C21.1@89.7,11.116 ; C21.1@90.6,10.1 C21.1 ; 60.983,15.8 61.3,15.8 ; C21.1@89.7,11.116 89.7,11 C21.1 ; C21.1@89.7,11.116 89.9,10.916 C21.1
  Bottom Layer w0.2: v1(34.4,50.4) 34.9,49.9 35.984,49.9 C18.1 ; C19.1 43.616,47.3 44.638,47.3 45.038,46.9 v1(45.2,46.9)
  Bottom Layer w0.5: v1(56.5,50.9) 56.5,46.281 56.6,46.181 v1(56.6,46.1) ; v1(56.6,64.6) 56.6,68.895 v1(56.605,68.9)
DVDD_REG1V8: C2.2 U1.14 | length 4.7
  Top Layer w0.2: C2.2 35.526,44 36.815,45.29 37.048,45.29 37.346,45.29 37.642,45.586 U1.14@37.642,46.117
EN: CN1.6 R13.1 U4.3 | length 30.1
  Top Layer w0.254: U4.3 48.27,17.8 v1(69.2,17.8) ; CN1.6 67.2,13.6 R13.1 v1(69.2,13.8)
  Bottom Layer w0.254: v1(69.2,13.8) v1(69.2,17.8)
GND: C2.1 C4.1 C6.2 C7.2 C8.1 C10.1 C11.1 C13.1 C14.2 C15.2 C16.2 C17.2 C18.2 C19.2 C20.2 C21.2 C22.2 C23.2 C24.2 C25.2 C26.1 C27.2 C28.2 CN1.2 D1.2 D4.3 D4.4 J1.A12 J1.B12 J1.MH1 J1.MH2 J1.MH3 J1.MH4 LCD1.2 LD1.2 LD2.2 LD3.2 R11.2 R12.2 R21.2 R22.2 R23.2 U1.13 U1.23 U1.25 U1.29 U1.42 U1.44 U1.49 U2.1 U3.1 U4.1 U4.40 U4.41_1 U4.41_2 U4.41_3 U4.41_4 U4.41_5 U4.41_6 U4.41_7 U4.41_8 U4.41_9 | length 95.4
  Top Layer w0.2: 36.072,46.124 U1.13 ; C8.1 v1(38.6,61.2) ; U1.44 39.15,50.35 U1.49 ; U4.41_3 U4.41_1 ; U1.42 40.15,49.85 U1.49 ; U1.49@40.6,49 U1.49@40.6,48.9 ; D1.2 40.378,62.9 40.204,63.074 40.204,63.192 40.184,63.212 40.184,63.884 v1(40.8,64.5) ; v1(41.3,61.3) 41.415,61.185 41.415,60.601 41.5,60.516 41.5,60.416 42,59.916 C15.2 ; 43.376,46.172 U1.25 ; U1.29 U1.49@40.65,48.85 ; v1(43.8,45.6) 43.638,45.6 43.238,45.2 42.544,45.2 42.158,45.586 42.158,46.117 U1.23 42.15,47.35 U1.49@40.65,48.85 ; C24.2 v1(60.2,58.3) ; J1.B12@93.981,48.862 94.061,48.782 J1.MH1@94.061,47.292 ; J1.A12@93.981,54.362 94.061,54.442 J1.MH2@94.061,55.932 ; U1.49 U1.49@40.6,48.9 ; U1.49@40.6,48.9 U1.49@40.65,48.85
  Top Layer w0.254: LCD1.2 5.276,21.14 C26.1 ; R21.2 R22.2 R23.2 ; R23.2@26.369,19.99 26.517,19.842 26.517,19.572 R23.2@26.728,19.572 ; R23.2@26.393,19.5 R23.2 ; R23.2@26.888,20.003 26.874,20.003 R23.2@26.578,19.708 ; v1(28.1,19.5) 28.028,19.572 R23.2@26.728,19.572 ; v1(28.3,48.6) C13.1 ; v1(28.3,50.9) 29.784,50.9 C14.2 ; v1(28.3,53.5) C11.1 ; v1(28.3,55.7) C4.1 ; v1(35.6,45.8) 35.748,45.8 36.072,46.124 ; 43.376,46.172 43.8,45.748 v1(43.8,45.6) ; v1(50.6,49.9) 50.608,49.892 50.608,48.308 C10.1 ; D4.4 D4.3 59.139,27.312 60.588,27.312 v1(60.6,27.3) ; v1(88,42.2) LD1.2 ; R23.2 R23.2@26.578,19.708 ; R23.2@26.578,19.708 26.592,19.708 R23.2@26.728,19.572
  Top Layer w0.5: v1(15.4,43.5) C6.2 ; v1(15.7,53.1) C7.2 ; v1(30.3,44) C2.1 ; U4.40 30.77,15.22 33.08,15.22 v1(33.1,15.2) ; U4.1 48.426,15.064 50.557,15.064 50.85,14.771 50.85,14.734 51.2,14.384 C28.2 53.608,14.392 55.392,14.392 v1(55.4,14.4) ; LD3.2 72.854,56.754 C23.2 78.1,56.8 U3.1 v1(78.2,54.4) ; v1(70.3,66.6) C25.2 ; LD2.2 83.277,4.023 83.277,5.977 v1(83.3,6) ; v1(88.2,63.9) C22.2 ; C20.2 v1(92.5,26.5) ; C21.2 96.6,10.9 v1(96.6,14.1) U2.1
  other v1: 28.611,9.312 68.611,9.312 40.3,22.2 38.896,22.256 41.7,22.3 38.896,23.656 40.3,23.7 41.7,23.7 83.8,24 72.6,25.8 58.611,29.312 68.611,29.312 88.611,29.312 5.2,29.8 19.6,29.9 22.3,32.2 6.9,32.4 26.5,33.2 22.1,34.7 27.9,35.4 8.6,36.8 29.6,37.2 13.611,39.312 53.611,39.312 63.611,39.312 73.611,39.312 83.611,39.312 9.2,42.3 38.3,47.8 8.611,49.312 18.611,49.312 58.611,49.312 68.611,49.312 78.611,49.312 40,49.4 38.3,51.4 63.611,59.312 73.611,59.312 83.611,59.312
I+: C5.2 D1.4 I+1.0 | length 18.1
  Top Layer w0.2: C5.2 30.084,59.7 29.3,60.484 29.3,64.3 30.1,65.1 35.942,65.1 37.642,63.4 D1.4
  Top Layer w0.254: I+1.0 29.884,59.8 C5.2
I-: C9.2 D1.6 I-1.0 | length 8.3
  Top Layer w0.2: C9.2 34.484,62.1 35.438,63.054 37.346,63.054 38,62.4 D1.6
  Top Layer w0.254: I-1.0 33.384,63.1 33.911,62.573 34.011,62.573 C9.2@34.484,62.1
IO0: CN1.5 R14.1 U4.27 | length 80
  Top Layer w0.254: U4.27 30.568,31.568 29.768,31.568 27.025,28.825 22.8,28.825 18,24.025 18,15.549 26.349,7.2 62.05,7.2 65.2,10.35 CN1.5 65.2,13.8 R14.1
JMP1: R26.2 U4.30 | length 10.5
  Top Layer w0.254: R26.2 21.9,26.6 23.24,27.94 U4.30
JMP2: R25.2 U4.31 | length 7.6
  Top Layer w0.254: R25.2 24.172,25.572 24.172,26.332 24.51,26.67 U4.31
JMP3: R24.2 U4.32 | length 4.4
  Top Layer w0.254: R24.2 30.65,25.5 U4.32
LCD_CLK: LCD1.7 LCD1.10 LCD1.15 U4.6 | length 118.8
  Top Layer w0.254: v1(4.9,34.9) 4.06,34.9 LCD1.7 23.06,33.84 v1(24.1,32.8) ; v1(32.7,28.4) 44.4,28.4 45.4,27.4 45.4,23.4 46.887,21.913 47.927,21.913 U4.6 71.89,21.59 89.215,38.915 LCD1.15
  Bottom Layer w0.254: LCD1.10 3.296,41.164 3.836,41.164 4.5,40.5 4.5,37.4 4.9,37 v1(4.9,34.9) ; v1(24.1,32.8) 24.204,32.8 24.704,32.3 26.2,32.3 30.1,28.4 v1(32.7,28.4)
LCD_CS: LCD1.3 U4.39 | length 30.7
  Top Layer w0.254: LCD1.3 9.22,23.68 v1(16.4,16.5) ; v1(19.7,16.5) 30.74,16.5 U4.39
  Bottom Layer w0.254: v1(16.4,16.5) v1(19.7,16.5)
LCD_MISO: LCD1.13 LCD1.16 U4.5 | length 122.3
  Top Layer w0.254: LCD1.13 5.996,46.084 5.996,45.504 v1(6.1,45.4) ; v1(6,39.1) 6,36.3 6.7,35.6 23.1,35.6 25.148,33.552 25.148,31.222 25.104,31.179 25.104,30.904 v1(25,30.8) ; v1(34.2,27.4) 38.424,27.4 38.624,27.6 42.7,27.6 44.5,25.8 44.5,23.1 46.957,20.643 47.927,20.643 U4.5 72.82,20.32 88.875,36.375 LCD1.16
  Bottom Layer w0.254: v1(6,39.1) 6,45.3 v1(6.1,45.4) ; v1(25,30.8) 28.6,27.2 33.852,27.2 34.052,27.4 v1(34.2,27.4)
LCD_MOSI: LCD1.6 LCD1.12 LCD1.17 U4.4 | length 126.9
  Top Layer w0.254: LCD1.12 6.719,42.821 7.479,42.821 v1(7.5,42.8) ; v1(4.6,32.3) 4.496,32.196 3.916,32.196 3.021,31.3 LCD1.6 3.296,31.004 3.918,31.004 3.922,31 22.598,31 23.101,30.498 v1(23.101,30.35) ; v1(33,25.8) 37.624,25.8 37.924,26.1 42.4,26.1 43.6,24.9 43.6,22.5 47.05,19.05 U4.4 73.65,19.05 88.4,33.8 97.165,33.8 LCD1.17
  Bottom Layer w0.254: v1(4.6,32.3) 7.5,35.2 v1(7.5,42.8) ; v1(23.101,30.35) 27.651,25.8 v1(33,25.8)
LCD_RESET: LCD1.4 U4.38 | length 31.5
  Top Layer w0.254: LCD1.4 9.38,26.22 v1(16.4,19.2) ; v1(19.8,19.1) 19.848,19.052 19.848,18.552 20.62,17.78 U4.38
  Bottom Layer w0.254: v1(16.4,19.2) 16.45,19.15 19.75,19.15 v1(19.8,19.1)
LCD_RS: LCD1.5 U4.15 | length 49.3
  Top Layer w0.254: LCD1.5 20.26,28.76 21.069,29.569 25.569,29.569 28.66,32.66 29.26,32.66 v1(31.4,34.8) ; v1(34.1,31.4) 34.2,31.3 46,31.3 46.485,31.785 U4.15
  Bottom Layer w0.254: v1(31.4,34.8) 34.019,32.181 34.019,31.481 v1(34.1,31.4)
LED1: R19.2 U4.9 | length 4.9
  Top Layer w0.254: U4.9 52.3,25.4 52.8,25.9 R19.2
LED2: R20.2 U4.10 | length 5.1
  Top Layer w0.254: U4.10 50.271,26.67 50.928,27.327 52.327,27.327 52.8,27.8 R20.2
NetC1_1: C1.1 R1.2 | length 2.7
  Top Layer w0.5: C1.1 42.884,61.9 43.75,61.034 43.75,60.25 44.1,59.9 R1.2
NetC3_1: C3.1 R3.2 | length 2.1
  Top Layer w0.2: R3.2 48.184,59.9 C3.1
NetC5_1: C5.1 R4.2 | length 2.2
  Top Layer w0.254: C5.1 33.9,59.6 R4.2
NetC9_1: C9.1 R5.2 | length 2.1
  Top Layer w0.254: R5.2 36.5,61.984 C9.1
NetD4_1: D4.1 R20.1 | length 3.1
  Top Layer w0.254: R20.1 56.997,27.9 57.572,27.324 D4.1
NetD4_2: D4.2 R19.1 | length 3.1
  Top Layer w0.254: R19.1 57.096,26 57.572,26.476 D4.2
NetJ1_A5: J1.A5 R11.1 | length 4.4
  Top Layer w0.254: R11.1 89.8,50.639 90.273,51.112 J1.A5@93.981,51.112
NetJ1_B5: J1.B5 R12.1 | length 4.3
  Top Layer w0.254: R12.1 90.188,52.112 J1.B5@93.981,52.112
NetLD1_1: LD1.1 R8.1 | length 2.7
  Top Layer w0.5: LD1.1 R8.1
NetLD2_1: LD2.1 R9.1 | length 2.6
  Top Layer w0.254: LD2.1 85.921,6.521 R9.1
NetLD3_1: LD3.1 R10.1 | length 2.7
  Top Layer w0.5: LD3.1 R10.1
NetR15_2: R15.2 U4.23 | length 4.3
  Top Layer w0.254: U4.23 36.675,33.35 36.675,34.863 37.1,35.288 R15.2
NetR16_2: R16.2 U4.26 | length 4.5
  Top Layer w0.254: R16.2 31.732,36.668 31.732,36.168 32.515,35.385 U4.26
NetR17_2: R17.2 U4.24 | length 4.1
  Top Layer w0.254: U4.24 35.055,36.855 R17.2
NetR18_2: R18.2 U4.25 | length 4.2
  Top Layer w0.254: R18.2 33.3,35.143 33.435,35.008 33.435,33.35 U4.25
NetR21_1: R21.1 R26.1 | length 2
  Top Layer w0.254: R21.1 21.9,21.529 R26.1
NetR22_1: R22.1 R25.1 | length 2
  Top Layer w0.254: R25.1 24.1,21.543 R22.1
NetR23_1: R23.1 R24.1 | length 2
  Top Layer w0.254: R23.1 26.4,21.529 R24.1
RCAL0: R2.2 U1.32 | length 5.3
  Top Layer w0.2: U1.32 48.65,50.35 R2.2
RCAL1: R2.1 U1.33 | length 6
  Top Layer w0.2: U1.33 46.15,50.85 47.7,52.4 R2.1
RXD0: CN1.3 U4.37 | length 35.3
  Top Layer w0.254: U4.37 43.55,19.05 v1(45.5,17.1) ; v1(51.2,12.8) 55,9 59.85,9 61.2,10.35 CN1.3
  Bottom Layer w0.254: v1(45.5,17.1) 45.604,16.996 47.004,16.996 v1(51.2,12.8)
SD_CS: LCD1.18 U4.8 | length 51.9
  Top Layer w0.254: U4.8 72.23,24.13 v1(72.3,24.2) ; v1(81.8,24.2) 81.9,24.2 88.995,31.295 LCD1.18
  Bottom Layer w0.254: v1(72.3,24.2) v1(81.8,24.2)
TCH_CS: LCD1.11 U4.7 | length 56.6
  Top Layer w0.254: LCD1.11 3.296,43.704 3.896,43.704 9.7,37.9 23.6,37.9 v1(28.1,33.4) ; v1(33.9,29.7) 34.048,29.7 34.248,29.5 45,29.5 46.3,28.2 46.3,23.8 47.24,22.86 U4.7
  Bottom Layer w0.254: v1(28.1,33.4) 31.8,29.7 v1(33.9,29.7)
TCH_IRQ: LCD1.14 U4.12 | length 55.3
  Top Layer w0.2: LCD1.14 15.52,39.1 25.7,39.1 v1(29.7,35.1) ; v1(32.5,31.3) 32.5,31.138 32.768,30.869 32.768,30.694 32.91,30.553 45.047,30.553 46.39,29.21 U4.12
  Bottom Layer w0.2: v1(29.7,35.1) 29.7,34.1 v1(32.5,31.3)
TXD0: CN1.4 U4.36 | length 41.6
  Top Layer w0.254: U4.36 44.28,20.32 46.4,18.2 v1(46.4,15.8) ; v1(49.8,12.7) 49.8,10.2 51.9,8.1 60.95,8.1 63.2,10.35 CN1.4
  Bottom Layer w0.254: v1(46.4,15.8) 46.404,15.796 46.993,15.796 49.696,13.093 49.696,12.804 v1(49.8,12.7)
U+: C1.2 D1.1 U+1.0 | length 8.1
  Top Layer w0.2: D1.1 41.4,62.4 42.1,63.1 43.916,63.1 44.916,62.1 C1.2 46.7,62 U+1.0
U-: C3.2 D1.3 U-1.0 | length 16.7
  Top Layer w0.2: D1.3 41.458,63.4 42.758,64.7 48.4,64.7 50.516,62.584 C3.2 50.716,59.8 U-1.0
VBIAS: C14.1 U1.8 | length 6.3
  Top Layer w0.2: C14.1@31.916,51.3 32.216,51 32.8,51 33.2,50.6 33.2,49.2 33.55,48.85 U1.8
VBIAS_CAP: C10.2 U1.31 | length 5.9
  Top Layer w0.2: U1.31 46.35,49.85 46.7,49.5 47.384,49.5 47.984,48.9 48.084,48.9 48.584,48.4 C10.2
VREF_1V8: C8.2 U1.43 | length 5.2
  Top Layer w0.2: C8.2 38.6,54.9 39.644,53.856 39.644,53.082 U1.43
VREF_2V5: C4.2 U1.4 | length 7.1
  Top Layer w0.2: C4.2 31.916,55.6 32.416,55.1 32.516,55.1 35.59,52.026 35.59,51.154 35.867,50.876 36.027,50.876 36.045,50.858 U1.4@36.417,50.858
VZERO: C13.2 U1.9 | length 4.9
  Top Layer w0.2: C13.2@31.916,49.1 31.916,49 32.566,48.35 U1.9
XTAL0: C6.1 U1.12 Y1.2 | length 18.8
  Top Layer w0.2: Y1.2 24.083,44.008 24.908,44.008 27.75,46.85 U1.12
  Top Layer w0.254: C6.1 23.575,43.5 Y1.2
XTAL1: C7.1 U1.11 Y1.1 | length 20.8
  Top Layer w0.2: Y1.1 23.7,51.425 27.775,47.35 U1.11
  Top Layer w0.254: C7.1 23.625,53.1 Y1.1
pads on no net: LCD1.9 U1.1 U1.2 U1.3 U1.7 U1.10 U1.24 U1.27 U1.28 U1.34 U1.35 U1.38 U1.39 U1.45 U1.48 U4.11 U4.13 U4.14 U4.16 U4.21 U4.22 U4.28 U4.29 U4.33 U4.34 U4.35

## Polygon pours and split planes (outlines as drawn)
GND on Top Layer "GNDtop" (solid, remove dead copper, pour order 3): 0,0 0,70 100,70 100,0
DVDD on Top Layer "DVDD_L01_P000" (solid, remove dead copper, pour order 0): 1.846,18.9 1.6,19.146 1.6,52.5 19.1,70 0,70 -0.1,69.9 -0.1,0 74.7,0 82.6,7.9 88.1,7.9 91.5,7.9 94.1,10.5 94.1,22.1 93.3,22.9 80.4,22.9 70.6,13.1 70.6,7.9 70.1,7.4 68.6,5.9 23.6,5.9 10.6,18.9
GND on Bottom Layer "GNDbot" (solid, remove dead copper, pour order 4): 0,0 0,70 100,70 100,0

## Keep-outs
Keep-Out Layer:
  circle w2: c96,4 r2
  circle w2: c96,66 r2
  circle w2: c4,66 r2
  circle w2: c4,4 r2
  lines w0.2: 0,0 100,0 100,70 0,70 0,0

## Silkscreen, mask and mechanical layers (free items; w line width, h text height)
Top Overlay:
  lines w0.254: 22.5,62.3 22.5,56.8 22.8,56.5 26.6,56.5 27.3,55.8 27.3,48.1 28,47.4 30.6,47.4
  text "3V3A" at 62.671,51.769 h3
  text "5V" at 81.45,40.869 h3
  text "3V3D" at 75.17,2.669 h3
  text "3V3 / GND / RX / TX / IO / EN" at 69.504,2.5 h2.5 r90

## Text inside footprints (layer, text, board x,y; h text height)
U4: Mechanical 13 "ANTENNA" at 44,11 h1.27 r180